# Altium PCB PCB1.PcbDoc
Units mm, origin at the board's own origin, x right, y up, seen from the top; angles counter-clockwise.
Board outline 100 x 50 mm, 2 copper layers (Top Layer, Bottom Layer); 11 components, 14 nets, 56 pads, 0 vias.
Unrouted connection lines stored in the file: 1.
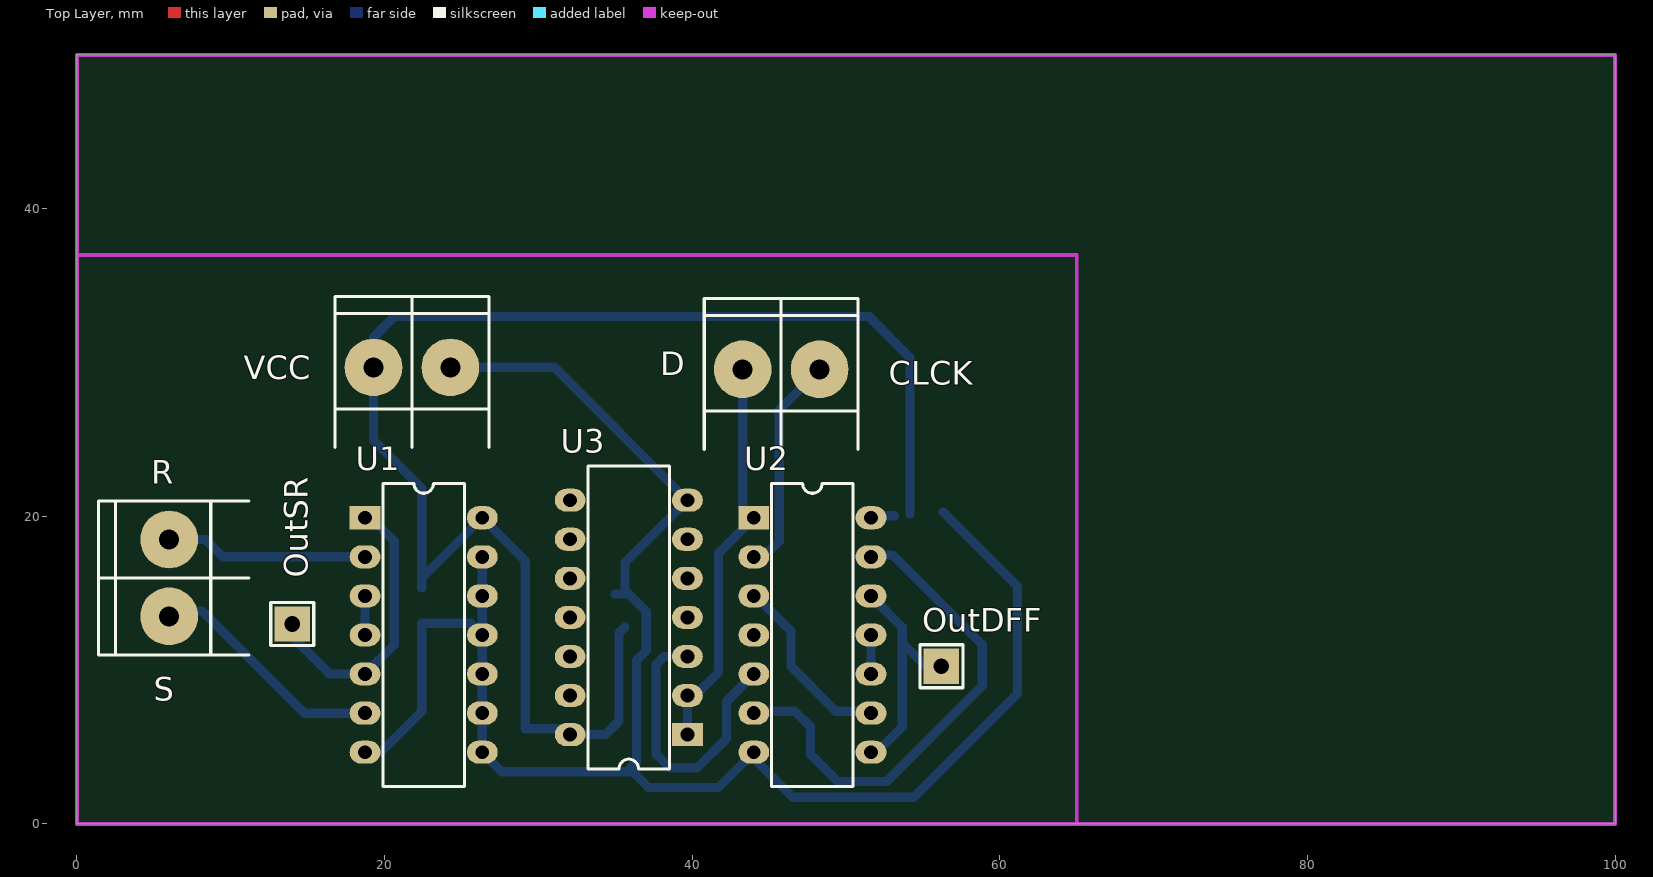
[diagram p0: Top Layer view]
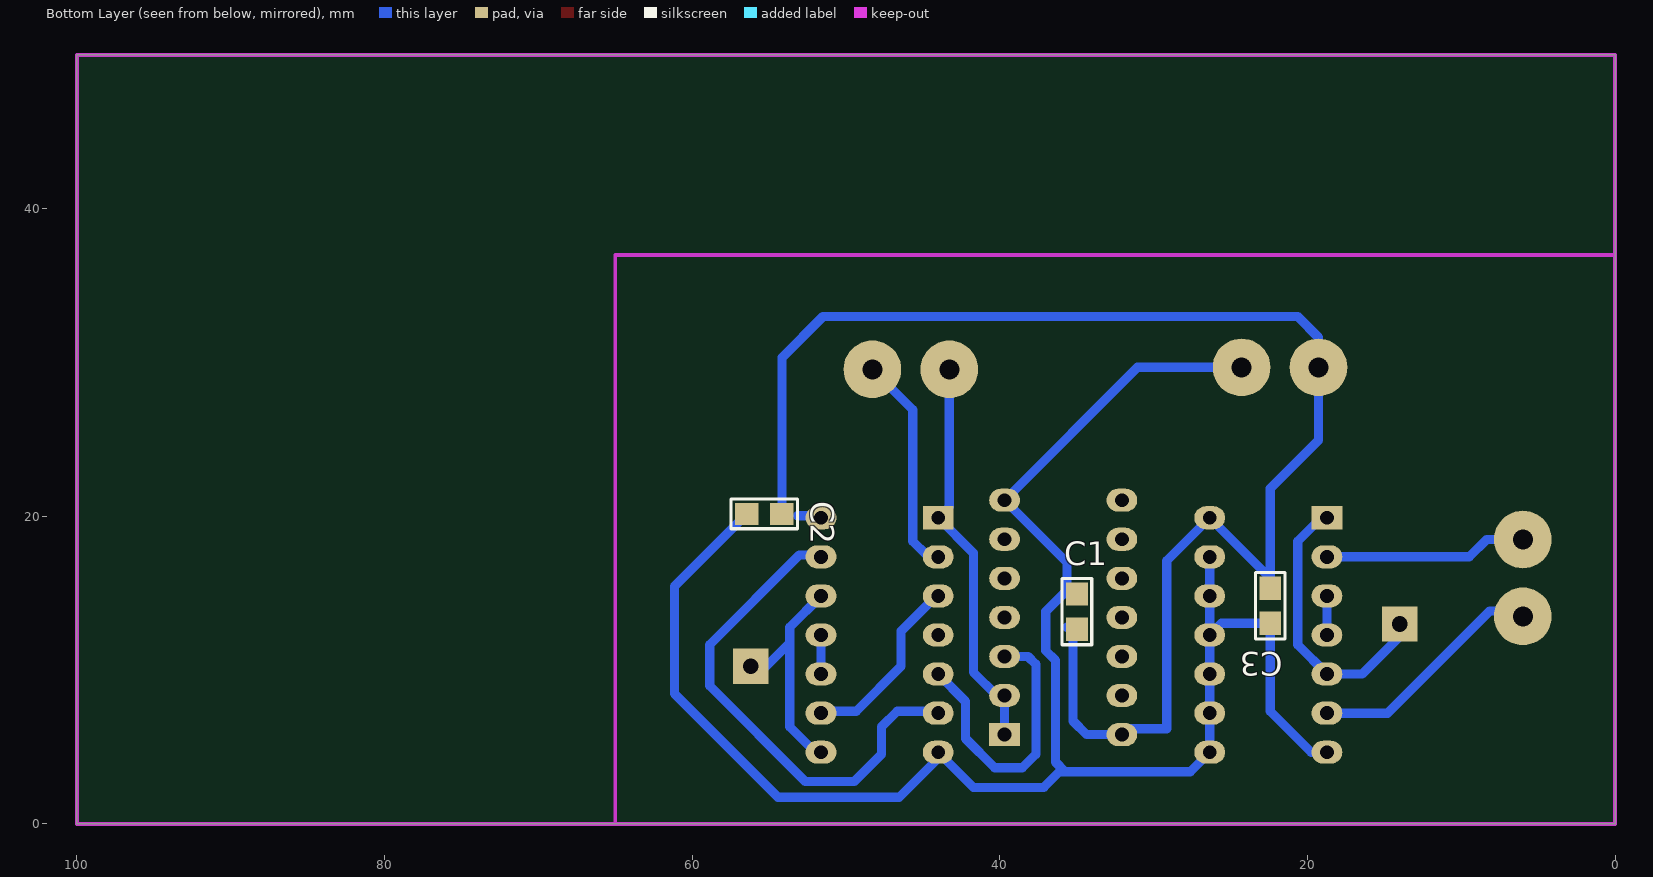
[diagram p1: Bottom Layer view, seen from below]
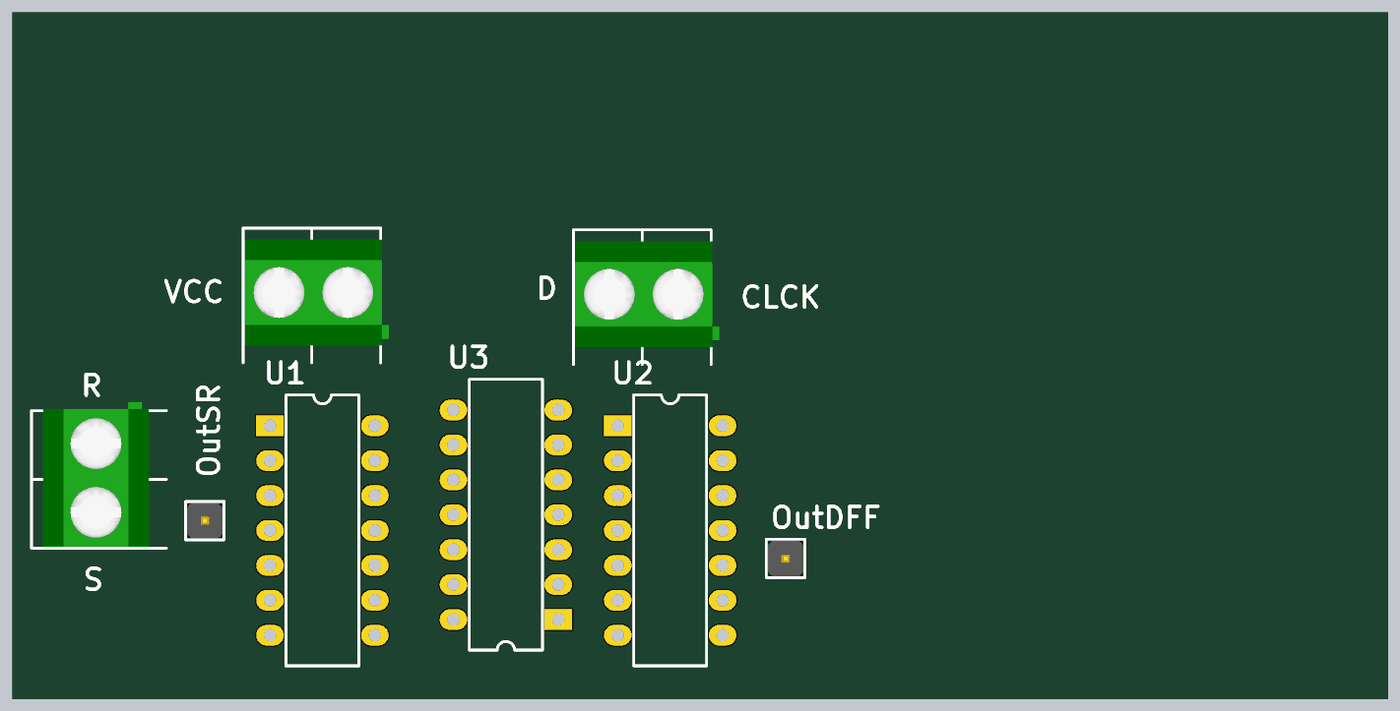
[diagram p2: 3D render of the assembled board from above, using the file's embedded part models]
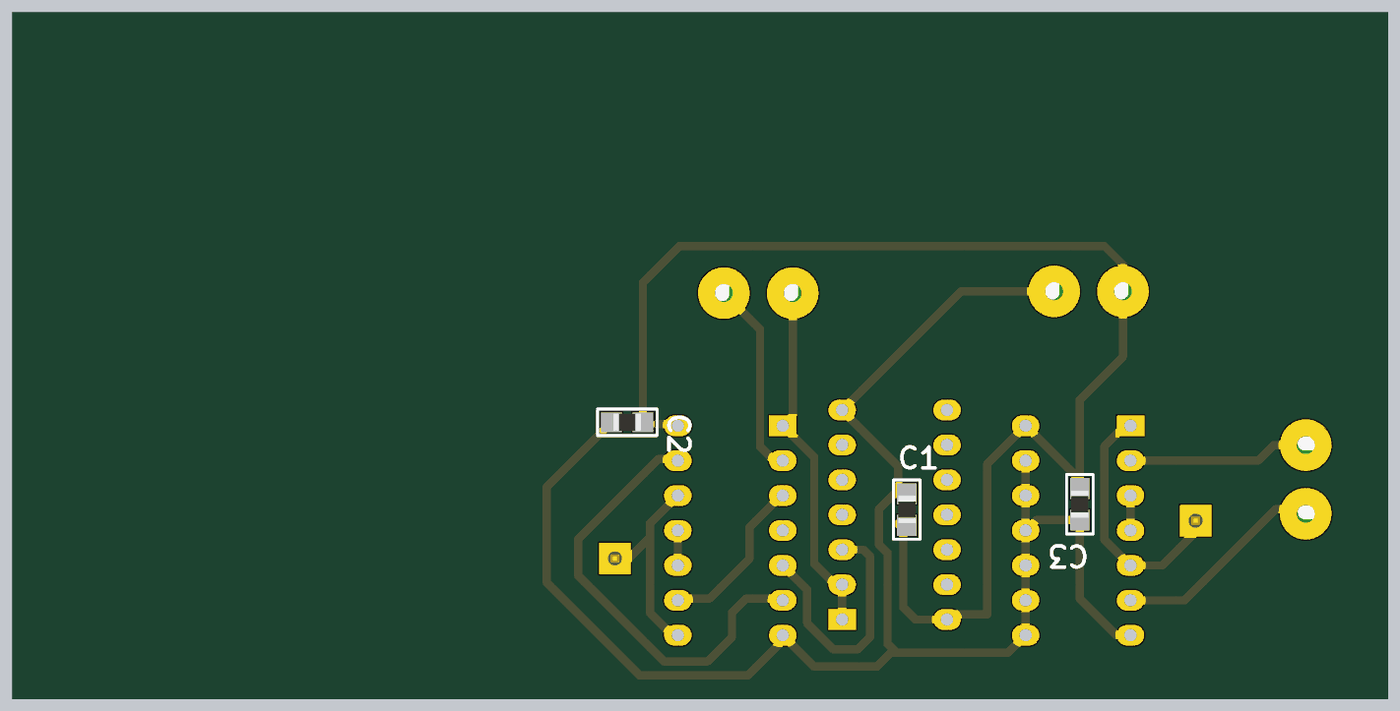
[diagram p3: 3D render of the assembled board from below, using the file's embedded part models]

## Layer stack, top to bottom
Top Solder: solder mask 0.0102, Solder Resist, Dk 3.5
Top Layer: signal copper 0.0356
Dielectric 1: dielectric 0.32, FR-4, Dk 4.8
Bottom Layer: signal copper 0.0356
Bottom Solder: solder mask 0.0102, Solder Resist, Dk 3.5

## Board outline
0,0 100,0 100,50 0,50

## Design rules (kind name [scope] priority, off if disabled: settings)
Clearance [All] p1: gap=0.254
PolygonConnect [All] p1: connectstyle=Relief reliefconductorwidth=0.254 reliefentries=4 polygonreliefangle="90 Angle" airgapwidth=0.254
RoutingVias [All] p1: holewidth=0.711 width=1.27 viastyle="Through Hole" minholewidth=0.711 minwidth=1.27 maxholewidth=0.711 maxwidth=1.27
SolderMaskExpansion [All] p1: expansion=0.102
Width [All] p1: maxlimit=0.6 minlimit=0.6 preferedwidth=0.6
30 further rules are at their usual default settings.

## Components (designator, comment, footprint, x,y, rotation, side; value= is the part's Value field where it differs from the comment)
C1 "100n" 0805 34.989,13.811 r90 bottom
C2 "100n" 0805 55.309,20.161 r0 bottom
C3 "100n" 0805 22.416,14.192 r270 bottom
D "BORNERA 2" BORNERA2 45.784,29.559 r270 top (schematic designator DFF)
OutDFF "TP" TPTH 56.198,10.255 r90 top
OutSR "TP" TPTH 14,13 r90 top
R "BORNERA 2" BORNERA2 6,16 r0 top (schematic designator SR)
U1 "MC74HC02AN" 646-06 22.543,12.287 r270 top
U2 "MC74HC132AN" 646-06 47.816,12.287 r270 top
U3 "MC74HC132AN" 646-06 35.878,13.43 r90 top
VCC "BORNERA 2" BORNERA2 21.781,29.686 r270 top

## Footprints (in the part's own frame and the unit in brackets; to place one, negate y for a bottom-side part, rotate by r counter-clockwise, add the part's x,y. Pads: shape width x height; smd on the part's side, far side on the other; paste and mask are expansions set on the pad)
646-06 [mm] "DIP; 14 Leads; Row Spacing 7.62 mm; Pitch 2.54 mm"
  rect 1.5x2 hole 0.9: 1(-7.62,-3.81)
  oval 1.5x2 hole 0.9: 2(-5.08,-3.81) 3(-2.54,-3.81) 4(0,-3.81) 5(2.54,-3.81) 6(5.08,-3.81) 7(7.62,-3.81) 8(7.62,3.81) 9(5.08,3.81) 10(2.54,3.81) 11(0,3.81) 12(-2.54,3.81) 13(-5.08,3.81) 14(-7.62,3.81)
  silkscreen extent -9.85,-2.65 9.85,2.65
0805 [mil] "Pasivo 0805"
  rect 60x56 smd: 1(-45,0) 2(45,0)
  silkscreen extent -85,-38 85,38, body extent -39,-25 39,25, height 15
BORNERA2 [mm] "Bornera con Tornillos 5mm separación"
  round 3.75 hole 1.3: 1(0,2.5) 2(0,-2.5)
  silkscreen extent -4.6,-5 5.2,5, body extent -3.76,-4.89 3.94,5.61, height 10
TPTH [mm]
  rect 2.3x2.3 hole 1.016: 1(0,0)
  silkscreen extent -1.4,-1.4 1.4,1.4, body extent -1.27,-1.27 1.27,1.27, height 6.04

## Part data
C1 C2 C3: library part CAP
U1: "Quad 2-Input NOR Gate"
U2 U3: "Quad 2-Input NAND Gate with Schmitt Trigger Inputs"

## Nets (pads, with @x,y where several pads share a name; then routed paths per layer and width w, separated by ;. In a path a pad name is that pad's centre, name@x,y a point inside that pad or via, vN(x,y) a via of type N, cw(c..) or ccw(c..) an arc to the next point about the centre after c; other vN are vias at no path point)
CLCK: D.1 U2.2 U2.4 | length 14.3
  Bottom Layer w0.6: U2.2@44.006,17.494 44.768,17.494 45.657,18.383 45.657,26.932 D.1
D: D.2 U2.1 U3.1 U3.2 | length 26.1
  Bottom Layer w0.6: U3.1 U3.2 40.196,8.35 41.72,9.874 41.72,17.621 U2.1 43.284,20.629 D.2
GND: C1.2 C2.2 C3.2 U1.7 U1.8 U1.9 U1.10 U1.11 U1.12 U1.13 U2.7 U3.7 VCC.1 | length 122.1
  Bottom Layer w0.6: U1.7 19.749,4.667 22.416,7.334 C3.2 25.591,13.049 U1.11 ; VCC.1 31.052,29.686 U3.7 35.624,16.986 C1.2@35.624,15.081 ; U1.13 U1.12 U1.11 ; C1.2 35.878,14.954 37.021,13.811 37.021,11.271 36.386,10.636 36.386,4.032 35.751,3.397 ; U2.7 U2.7@43.816,4.477 ; C2.2@56.325,20.288 61.151,15.462 61.151,8.477 54.42,1.746 46.546,1.746 U2.7@43.816,4.477 ; U1.11 U1.10 U1.9 U1.8 27.623,3.397 35.751,3.397 ; 35.751,3.397 36.132,3.397 37.148,2.381 41.72,2.381 U2.7@43.816,4.477
NetOutDFF_1: OutDFF.1 U2.8 U2.12 | length 15
  Bottom Layer w0.6: U2.12@51.118,14.954 U2.12@51.436,14.637 ; U2.8 52.007,4.667 53.658,6.318 53.658,11.779 ; U2.12 53.658,12.795 53.658,11.779 ; OutDFF.1@55.436,10.001 53.658,11.779
NetOutSR_1: OutSR.1 U1.1 U1.5 | length 17.7
  Bottom Layer w0.6: OutSR.1@14.034,12.16 16.447,9.747 U1.5 20.638,11.652 20.638,18.383 19.495,19.526 19.114,19.526 U1.1
NetU1_3: U1.3 U1.4 | length 2.5
  Bottom Layer w0.6: U1.4 U1.3
NetU2_3: U2.3 U2.9 | length 11.1
  Bottom Layer w0.6: U2.3@44.07,14.891 46.419,12.541 46.419,10.255 49.34,7.334 U2.9@50.737,7.334
NetU2_5: U2.5 U3.3 | length 18.7
  Bottom Layer w0.6: U3.3 38.164,10.89 37.656,10.382 37.656,4.54 38.545,3.651 40.323,3.651 42.228,5.556 42.228,7.969 U2.5
NetU2_6: U2.6 U2.13 | length 32.7
  Bottom Layer w0.6: U2.6@44.006,7.334 46.673,7.334 47.689,6.318 47.689,4.54 49.467,2.762 52.642,2.762 58.865,8.985 58.865,11.652 53.023,17.494 U2.13@51.626,17.494
NetU2_10: U2.10 U2.11 | length 2.5
  Bottom Layer w0.6: U2.10 U2.11
R: R.1 U1.2 | length 13.2
  Bottom Layer w0.6: R.1 8.344,18.5 9.477,17.367 U1.2
S: R.2 U1.6 | length 15.5
  Bottom Layer w0.6: R.2@6,13.851 8.152,13.851 14.796,7.207 U1.6
VCC: C1.1 C2.1 C3.1 U1.14 U2.14 U3.14 VCC.2 | length 99.4
  Bottom Layer w0.6: C3.1 C3.1@22.416,15.97 ; C1.1@35.624,12.795 35.243,12.414 35.243,6.699 34.354,5.81 U3.14 31.687,6.191 29.147,6.191 29.147,17.113 U1.14 C3.1@22.416,15.97 ; U2.14@51.372,20.034 53.15,20.034 ; C2.1 54.166,30.321 51.499,32.988 20.638,32.988 19.281,31.631 VCC.2 19.281,24.947 22.416,21.812 C3.1@22.416,15.97
VDD: 
pads on no net: U3.4 U3.5 U3.6 U3.8 U3.9 U3.10 U3.11 U3.12 U3.13

## Keep-outs
Keep-Out Layer:
  lines w0.254: 0,37 65,37 65,0 ; 0,0 0,50 100,50 100,0 0,0

## Silkscreen, mask and mechanical layers (free items; w line width, h text height)
Top Overlay:
  text "CLCK" at 52.769,28.543 h1.52
  text "S" at 5,8 h1.52